# EAGLE board ArcadeFlasher_attiny84 (EAGLE 9.3.0)
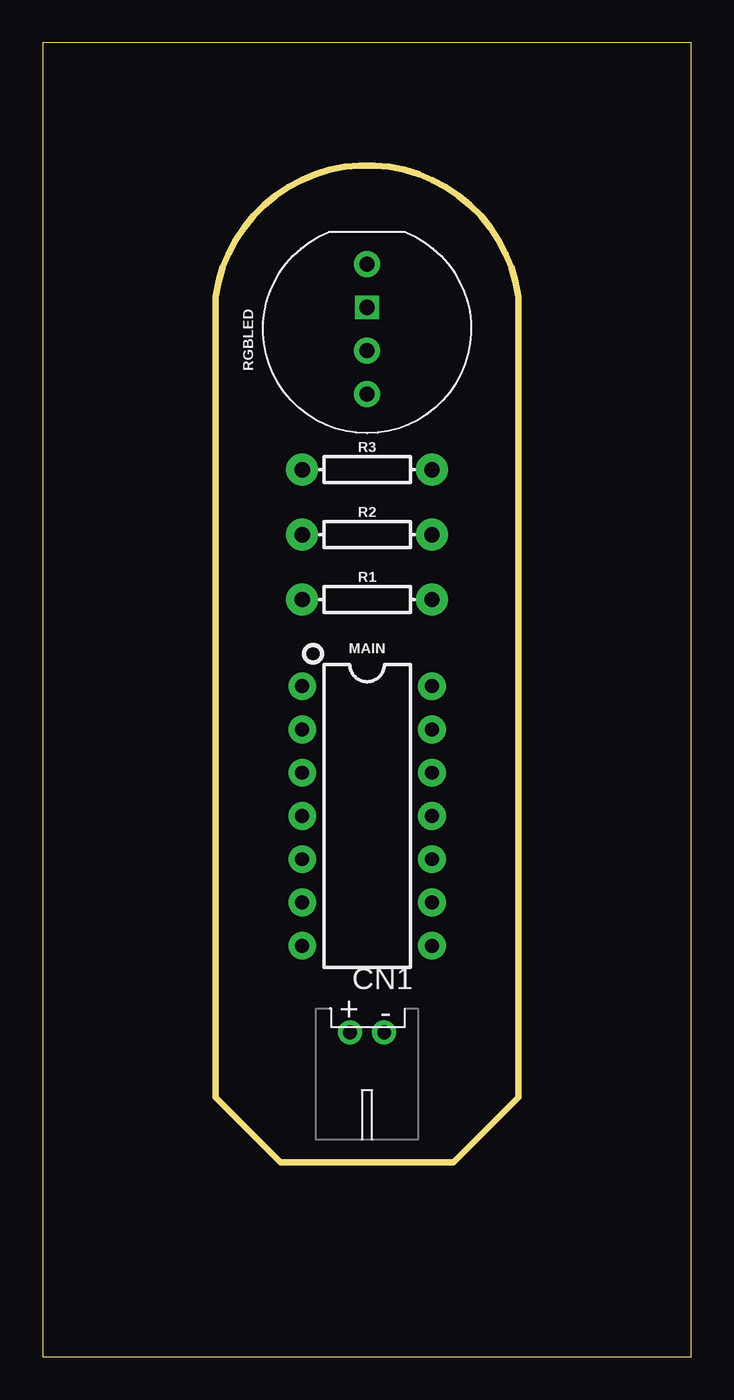
[diagram p0: board, top side]
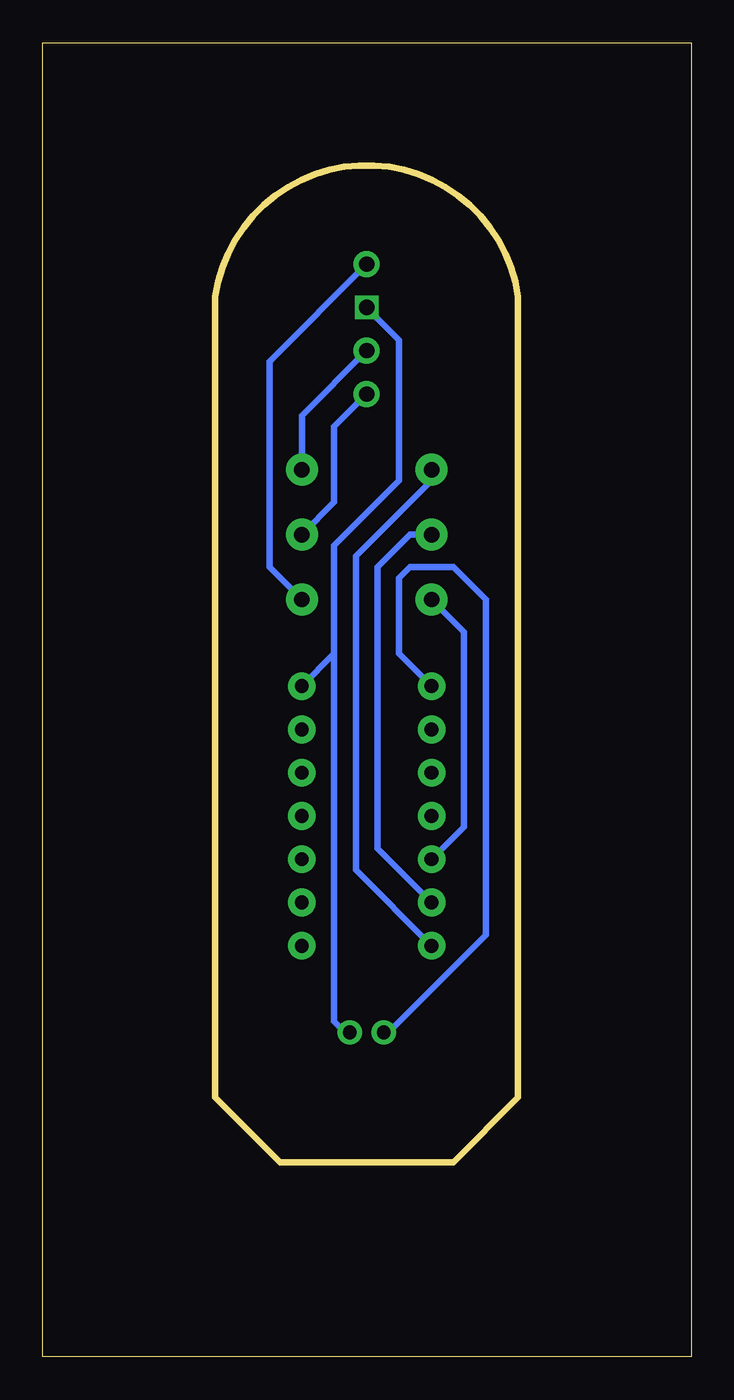
[diagram p1: board, bottom side, seen from below]

Size 38.08 x 77.14 mm. Coordinates in mm from the lower left corner, seen from the top.
Outline: 0,0 38.08,0 38.08,77.14 0,77.14 0,0
Outline: 10.16,62.23 arc-164 27.94,62.23 27.94,15.24 24.13,11.43 13.97,11.43 10.16,15.24 10.16,62.23
Copper layers (1*16): Top 0.035mm / dielectric 1.5mm / Bottom 0.035mm
Design rules "OthermillDRC_30_deg_v2": minimum track width 6mil, minimum drill 0.8mm, track to track 6mil, track to pad 6mil, pad to pad 6mil, via to via 6mil, smd to smd 0mil, copper to edge 0mil, drill to drill 6mil, minimum pad ring 10mil, minimum via ring 10mil, stop-mask expansion 1mil, vias tented up to drill 30mil, thermal gap 6mil

## Footprints (pad centres in the part's own frame; a part is rotated, then mirrored left to right if it is on the bottom)
JST-PH-2-THM-RA = drill 0.8 pad 1.422: 1 1,0; 2 -1,0
DIP14 = drill 0.813 pad 1.626: 1 -7.62,-3.81; 2 -5.08,-3.81; 3 -2.54,-3.81; 4 0,-3.81; 5 2.54,-3.81; 6 5.08,-3.81; 7 7.62,-3.81; 8 7.62,3.81; 9 5.08,3.81; 10 2.54,3.81; 11 0,3.81; 12 -2.54,3.81; 13 -5.08,3.81; 14 -7.62,3.81
AXIAL-0.3 = drill 0.9 pad 1.88: P$1 -3.81,0; P$2 3.81,0
LED-RGB-THRU = drill 0.889 pad 1.524: 1 0.635,0; 3 -4.445,0; 4 -6.985,0 | drill 0.889 pad 1.397 square: 2 -1.905,0

## Placement (x,y rotation side)
CN1  [JST-PH-2-THM-RA]  19.05,19.05 180 top
MAIN  ATTINY84ATTINY84-20PU  [DIP14]  19.05,31.75 270 top
R1  330  [AXIAL-0.3]  19.05,44.45 0 top
R2  330  [AXIAL-0.3]  19.05,48.26 0 top
R3  330  [AXIAL-0.3]  19.05,52.07 0 top
RGBLED  DIFFUSE  [LED-RGB-THRU]  19.05,63.5 90 top

## Library data of the parts
CN1 = adafruit
MAIN = SparkFun-IC-Microcontroller
R1-R3 = SparkFun-Resistors; PROD_ID: RES-8371
RGBLED = SparkFun-LED; PROD_ID: DIO-09434

## Nets
N$1: MAIN.5 R1.P$1
N$2: MAIN.6 R2.P$1
N$3: MAIN.7 R3.P$1
N$4: R3.P$2 RGBLED.3
N$5: R2.P$2 RGBLED.4
N$6: R1.P$2 RGBLED.1
N$7: CN1.1 MAIN.1
N$8: CN1.2 MAIN.14 RGBLED.2

## Tracks (layer width: path | path; a pad name or v marks a point on that pad's centre or on a via)
N$1
  Bottom 0.381: MAIN.5 13.33,31.11 13.33,42.54 R1.P$1
N$2
  Bottom 0.381: MAIN.6 18.41,29.84 18.41,46.35 16.51,48.26 R2.P$1
N$3
  Bottom 0.381: MAIN.7 19.68,28.57 19.68,46.99 15.24,51.43 R3.P$1
N$4
  Bottom 0.381: RGBLED.3 22.86,55.24 R3.P$2
N$5
  Bottom 0.381: RGBLED.4 20.95,54.61 20.95,50.16 R2.P$2
N$6
  Bottom 0.381: RGBLED.1 24.76,58.42 24.76,46.35 R1.P$2
N$7
  Bottom 0.381: MAIN.1 17.14,41.27 17.14,45.72 16.51,46.35 13.97,46.35 12.06,44.45 12.06,24.77 17.78,19.05 CN1.1
N$8
  Bottom 0.381: RGBLED.2 17.14,59.69 17.14,51.43 20.95,47.62 20.95,41.27 | MAIN.14 20.95,41.27 | 20.95,41.27 20.95,19.68 20.32,19.05 CN1.2